# Altium PCB PCB2.PcbDoc
Units mm, origin at the board's own origin, x right, y up, seen from the top; angles counter-clockwise.
Board outline 109.47 x 143.76 mm, 2 copper layers (Top Layer, Bottom Layer); 56 components, 34 nets, 153 pads, 0 vias.
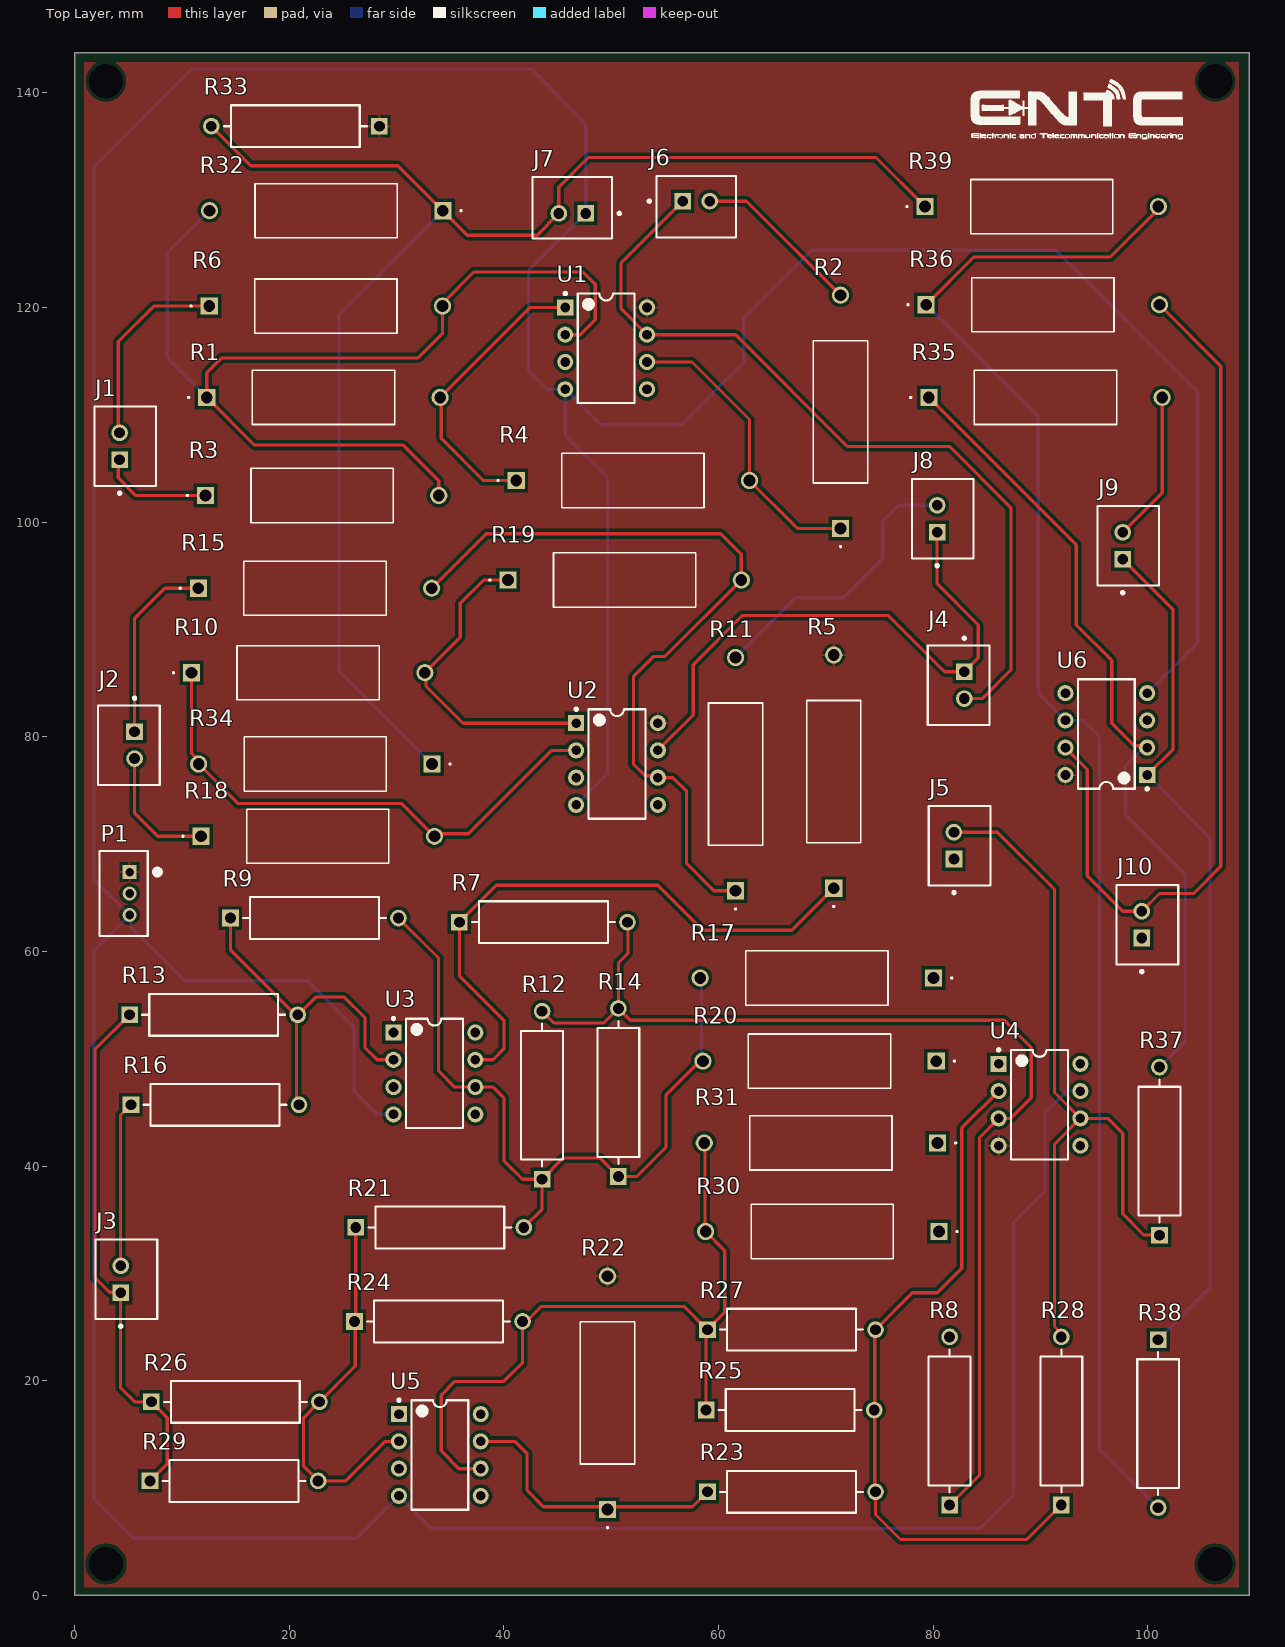
[diagram p0: Top Layer view]
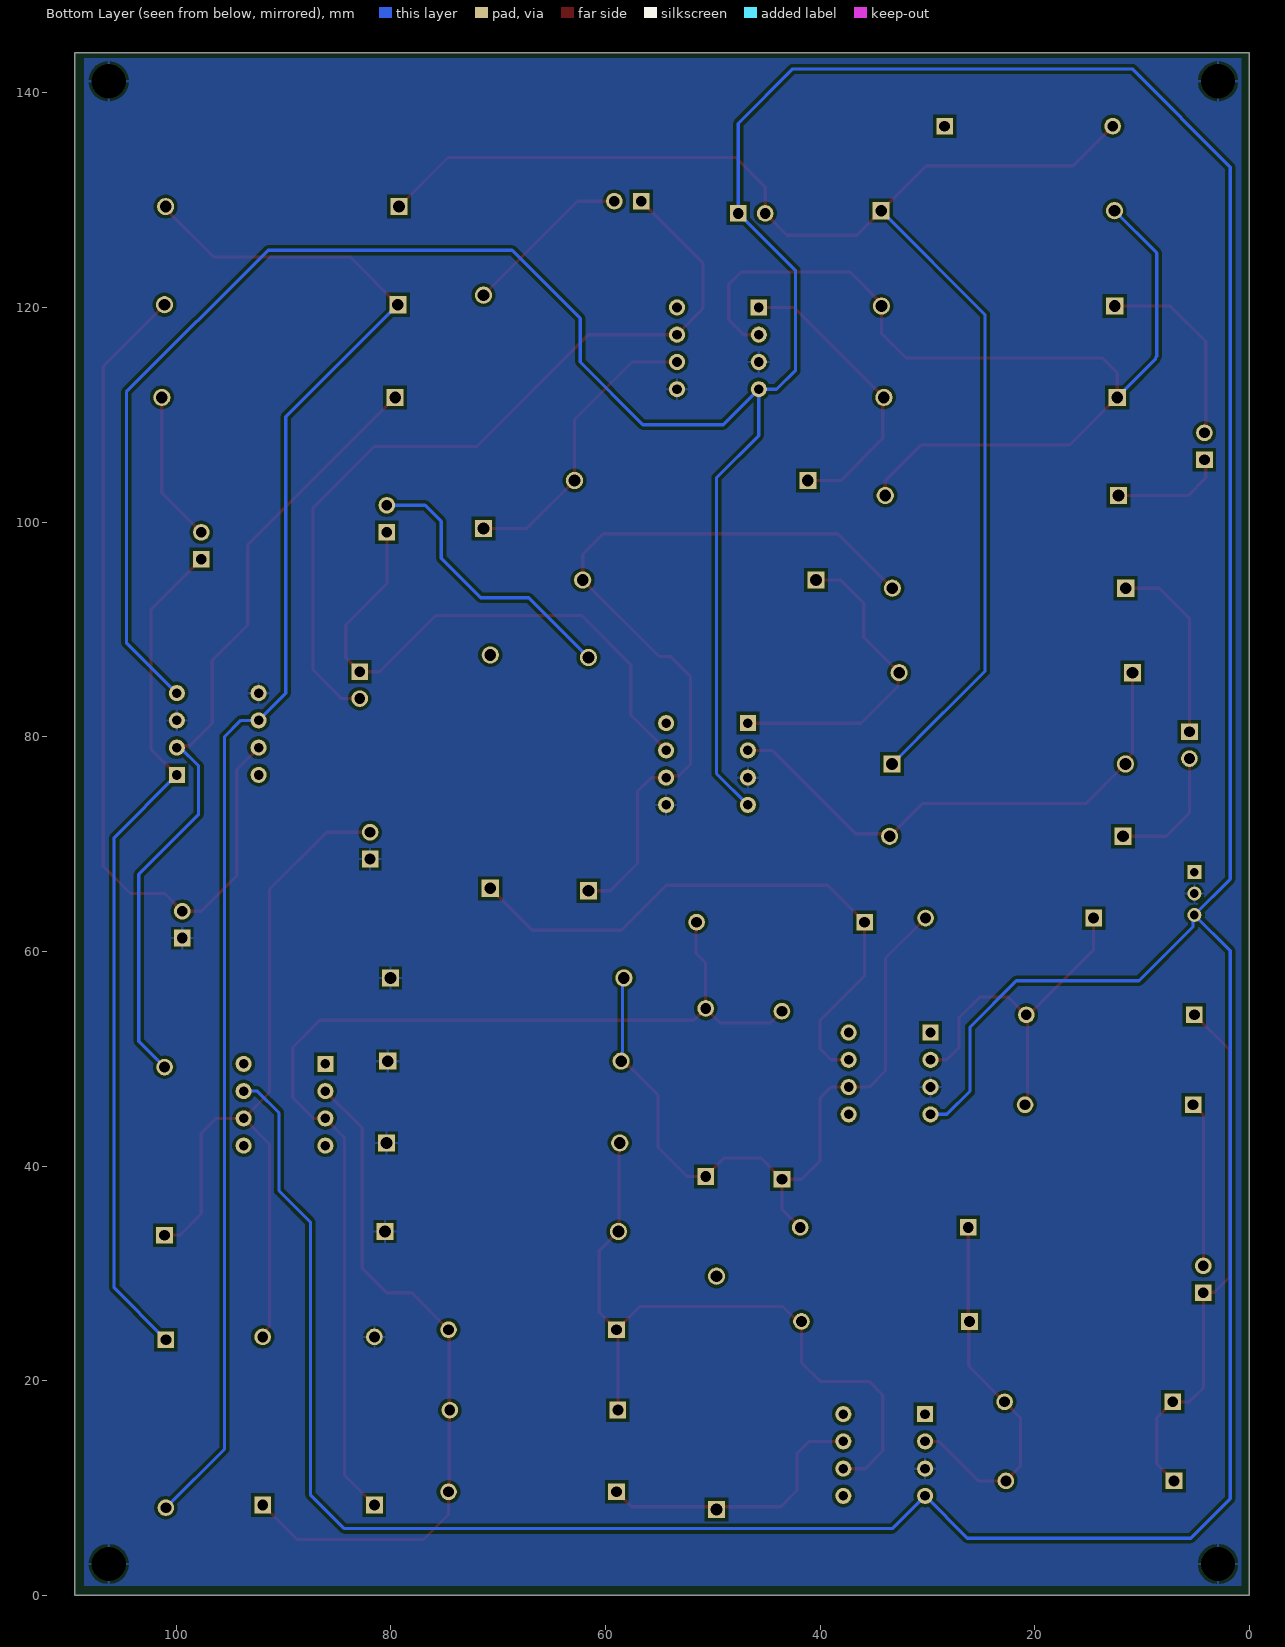
[diagram p1: Bottom Layer view, seen from below]
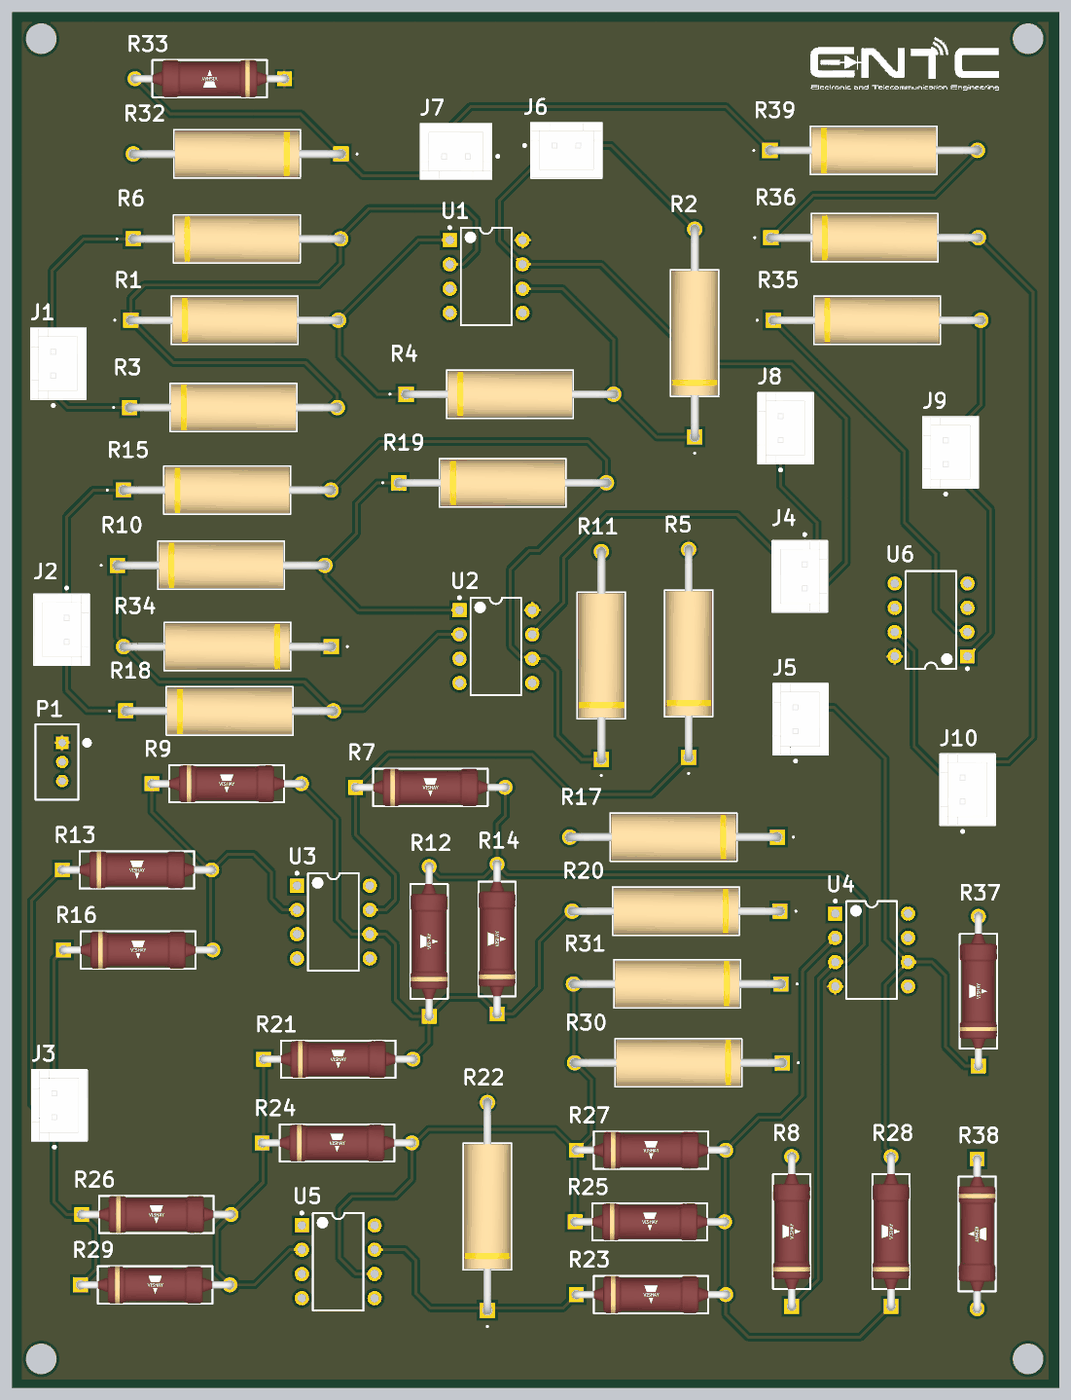
[diagram p2: 3D render of the assembled board from above, using the file's embedded part models]

## Layer stack, top to bottom
Top Solder: solder mask 0.0102, Solder Resist, Dk 3.5
Top Layer: signal copper 0.0356
Dielectric 1: dielectric 0.32, FR-4, Dk 4.8
Bottom Layer: signal copper 0.0356
Bottom Solder: solder mask 0.0102, Solder Resist, Dk 3.5

## Board outline
0,0 109.474,0 109.474,143.764 0,143.764

## Design rules (kind name [scope] priority, off if disabled: settings)
Clearance [All] p1: gap=0.3 ignorepadtopadclearanceinfootprint=FALSE
HoleSize [All] p1: absolutevalues=TRUE maxlimit=6.3 minlimit=0.3 maxpercent=80.000 minpercent=20.000
PolygonConnect [All] p1: connectstyle=Relief reliefconductorwidth=0.254 reliefentries=4 polygonreliefangle="90 Angle" airgapwidth=0.254
RoutingVias [All] p1: holewidth=0.3 width=0.6 viastyle="Through Hole" minholewidth=0.3 minwidth=0.6 maxholewidth=0.3 maxwidth=0.6
SilkToSolderMaskClearance [IsPad] p1: minsilkscreentomaskgap=0.1 clearancetoexposedcopper=TRUE
SolderMaskExpansion [All] p1: expansion=0.102 istentingtop=FALSE
UnRoutedNet [All] p1: checkbadconnections=TRUE
Width [All] p1: maxlimit=1 minlimit=0.3 preferedwidth=0.5
27 further rules are at their usual default settings.

## Components (designator, comment, footprint, x,y, rotation, side; value= is the part's Value field where it differs from the comment)
J1 "B2B-XH-A(LF)(SN)" FP-B2B-XH-A_LF_SN-MFG 4.716,107.081 r90 top
J2 "B2B-XH-A(LF)(SN)" FP-B2B-XH-A_LF_SN-MFG 5.063,79.228 r270 top
J3 "B2B-XH-A(LF)(SN)" FP-B2B-XH-A_LF_SN-MFG 4.826,29.464 r90 top
J4 "B2B-XH-A(LF)(SN)" FP-B2B-XH-A_LF_SN-MFG 82.381,84.82 r270 top
J5 "B2B-XH-A(LF)(SN)" FP-B2B-XH-A_LF_SN-MFG 82.465,69.866 r90 top
J6 "B2B-XH-A(LF)(SN)" FP-B2B-XH-A_LF_SN-MFG 57.932,129.396 r0 top
J7 "B2B-XH-A(LF)(SN)" FP-B2B-XH-A_LF_SN-MFG 46.375,129.303 r180 top
J8 "B2B-XH-A(LF)(SN)" FP-B2B-XH-A_LF_SN-MFG 80.899,100.33 r90 top
J9 "B2B-XH-A(LF)(SN)" FP-B2B-XH-A_LF_SN-MFG 98.188,97.81 r90 top
J10 "B2B-XH-A(LF)(SN)" FP-B2B-XH-A_LF_SN-MFG 99.966,62.504 r90 top
P1 "B3B-PH-K-S(LF)(SN)" JST-B3B-PH-K-S-3_V 4.572,65.405 r270 top
R1 "AC03000004701JAC00" RES_AC03_VIS 12.319,111.633 r0 top
R2 "AC03000004701JAC00" RES_AC03_VIS 71.374,99.416 r90 top
R3 "AC03000004701JAC00" RES_AC03_VIS 12.192,102.489 r0 top
R4 "AC03000004701JAC00" RES_AC03_VIS 41.148,103.886 r0 top
R5 "AC03000002201JAC00" RES_AC03_VIS 70.739,65.888 r90 top
R6 "AC03000004701JAC00" RES_AC03_VIS 12.548,120.142 r0 top
R7 "PR02000201003JA100" FP-PR02000201003JA100-MFG 43.688,62.738 r0 top
R8 "PR02000201003JA100" FP-PR02000201003JA100-MFG 81.534,16.256 r90 top
R9 "PR02000201003JA100" FP-PR02000201003JA100-MFG 22.352,63.119 r0 top
R10 "AC03000004701JAC00" RES_AC03_VIS 10.897,85.979 r0 top
R11 "AC03000004701JAC00" RES_AC03_VIS 61.595,65.659 r90 top
R12 "PR02000201003JA100" FP-PR02000201003JA100-MFG 43.561,46.609 r90 top
R13 "PR02000201003JA100" FP-PR02000201003JA100-MFG 12.954,54.102 r0 top
R14 "PR02000201003JA100" FP-PR02000201003JA100-MFG 50.673,46.863 r90 top
R15 "AC03000004701JAC00" RES_AC03_VIS 11.532,93.853 r0 top
R16 "PR02000201003JA100" FP-PR02000201003JA100-MFG 13.081,45.72 r0 top
R17 "AC03000004701JAC00" RES_AC03_VIS 80.035,57.531 r180 top
R18 "AC03000004701JAC00" RES_AC03_VIS 11.786,70.739 r0 top
R19 "AC03000004701JAC00" RES_AC03_VIS 40.386,94.615 r0 top
R20 "AC03000004701JAC00" RES_AC03_VIS 80.289,49.784 r180 top
R21 "PR02000201003JA100" FP-PR02000201003JA100-MFG 34.036,34.29 r0 top
R22 "AC03000002201JAC00" RES_AC03_VIS 49.657,8.001 r90 top
R23 "PR02000201003JA100" FP-PR02000201003JA100-MFG 66.802,9.652 r0 top
R24 "PR02000201003JA100" FP-PR02000201003JA100-MFG 33.909,25.527 r0 top
R25 "PR02000201003JA100" FP-PR02000201003JA100-MFG 66.675,17.272 r0 top
R26 "PR02000201003JA100" FP-PR02000201003JA100-MFG 14.986,18.034 r0 top
R27 "PR02000201003JA100" FP-PR02000201003JA100-MFG 66.802,24.765 r0 top
R28 "PR02000201003JA100" FP-PR02000201003JA100-MFG 91.948,16.256 r90 top
R29 "PR02000201003JA100" FP-PR02000201003JA100-MFG 14.859,10.668 r0 top
R30 "AC03000004701JAC00" RES_AC03_VIS 80.543,33.909 r180 top
R31 "AC03000004701JAC00" RES_AC03_VIS 80.416,42.164 r180 top
R32 "AC03000004701JAC00" RES_AC03_VIS 34.315,129.032 r180 top
R33 "PR02000201003JA100" FP-PR02000201003JA100-MFG 20.574,136.906 r180 top
R34 "AC03000004701JAC00" RES_AC03_VIS 33.299,77.47 r180 top
R35 "AC03000004701JAC00" RES_AC03_VIS 79.604,111.633 r0 top
R36 "AC03000004701JAC00" RES_AC03_VIS 79.35,120.269 r0 top
R37 "PR02000201003JA100" FP-PR02000201003JA100-MFG 101.092,41.402 r90 top
R38 "PR02000201003JA100" FP-PR02000201003JA100-MFG 100.965,16.002 r270 top
R39 "AC03000004701JAC00" RES_AC03_VIS 79.248,129.413 r0 top
U1 "TL072CP" P0008A 49.53,116.205 r0 top
U2 "TL072CP" P0008A 50.546,77.47 r0 top
U3 "UA741CP" P0008A 33.528,48.641 r0 top
U4 "UA741CP" P0008A 89.916,45.72 r0 top
U5 "UA741CP" P0008A 34.036,13.081 r0 top
U6 "TL072CP" P0008A 96.139,80.264 r180 top

## Footprints (in the part's own frame and the unit in brackets; to place one, negate y for a bottom-side part, rotate by r counter-clockwise, add the part's x,y. Pads: shape width x height; smd on the part's side, far side on the other; paste and mask are expansions set on the pad)
FP-B2B-XH-A_LF_SN-MFG [mm]
  rect 1.55x1.55 hole 1 paste-1000 mask+0: 1(-1.25,0.525)
  round 1.55 hole 1 paste-1000 mask+0: 2(1.25,0.525)
  silkscreen extent -4.5,-2.88 3.7,2.88, body extent -3.8,-2.98 3.8,2.98, height 0.25
FP-PR02000201003JA100-MFG [mm]
  rect 1.55x1.55 hole 1 paste-1000 mask+0: 1(-7.83,0)
  round 1.55 hole 1 paste-1000 mask+0: 2(7.83,0)
  silkscreen extent -6.66,-1.95 6.66,1.95, body extent -8.7,-2.05 8.7,2.05, height 0.25
JST-B3B-PH-K-S-3_V [mm] "Connector, 3-Leads, Body 7.9x4.5mm, Pitch 2mm"
  rect 1.3x1.3 hole 0.8: 1(-2,0.55)
  round 1.3 hole 0.8: 2(0,0.55) 3(2,0.55)
  silkscreen extent -3.95,-2.25 3.95,3.4, body extent -3.95,-2.25 3.95,2.25, height 6
P0008A [mm] "DIP, 8-Leads, Body 10.15x6.6mm, Pitch 2.54mm"
  rect 1.5x1.5 hole 0.9: 1(-3.81,3.81)
  round 1.5 hole 0.9: 2(-3.81,1.27) 3(-3.81,-1.27) 4(-3.81,-3.81) 5(3.81,-3.81) 6(3.81,-1.27) 7(3.81,1.27) 8(3.81,3.81)
  silkscreen extent -3.93,-5.1 2.65,5.23, body extent -3.95,-5.07 3.95,5.07, height 5.08
RES_AC03_VIS [mil]
  rect 63x63 / inner round 60 / far side rect 63x63 hole 43 paste-31.5 mask+0: 1(0,0)
  round 63 / inner round 60 / far side round 63 hole 43 paste-31.5 mask+0: 2(856,0)
  silkscreen extent -69,-100 689,100, body extent -16,-95 873,95, height 189

## Part data
J1 J2 J3 J4 J5 J6 J7 J8 J9 J10: library part CMP-2000-05888-3, "CONN HEADER VERT 2POS 2.5MM", Color=Natural, Contact Resistance=20mR, Current Rating=3A, Housing Color=White, Insulation Resistance=1GR, Max Operating Temperature=85°C, Max Voltage Rating (AC)=250V, Min Operating Temperature=-25°C, Connector Type="Male Pin", Contact Material=Brass, Contact Plating=Tin, Contact Type="Male Pin", Depth=5.75mm, Fastening Type=Detent, Housing Material=Polyamide, Lead Free="Lead Free", Lead Pitch=2.5mm, Length=7.4mm, Max Current Rating=3A, Max Voltage Rating (DC)=250V, Mount="Through Hole", Number of Contacts=2, Number of Positions=2, Number of Rows=1, Orientation=Straight, Packaging=Bulk, Pitch=2.5mm, REACH SVHC="No SVHC", Series=XH, Termination=Solder, Voltage Rating=250V, Voltage Rating (AC)=250V, Wire/Cable Gauge=22AWG
P1: library part CMP-2000-05164-1, "Male Header, Pitch 2 mm, 1 x 3 Position, Height 6 mm, Tail Length 3.4 mm, -25 to 85 degC, RoHS, Bulk", Manufacturer=JST, Datasheet URL=https://datasheet.ciiva.com/11746/0900766b80826550-11746939.pdf, Datasheet Version=Oct-06, Manufacturer URL=http://www.jst.com/home2.html, No of Positions=3, Pitch=2mm, Style/Orientation=StraightHeader/Plug, Termination=Crimp, Type=ShroudedHeader
R1 R2 R3 R4 R6 R10 R11 R15 R17 R18 R19 R20 R30 R31 R32 R34 R35 R36 R39: library part CMP-00030-42521947-1, "AC03000004701JAC00 Fixed Resistor, Wire Wound, 3W, 4700ohm, 5% +/-Tol, 100ppm/Cel, Through Hole Mount", Case/Package=Axial, Max Operating Temperature=275°C, Max Power Dissipation=3W, Min Operating Temperature=-40°C, Resistance=4.7kΩ, Temperature Coefficient=100ppm/°C, Tolerance=5%, Voltage Rating (DC)=118V, Composition=Wirewound, Contact Plating=Tin, Diameter=4.8mm, Features="Flame Retardant Coating", Lead Diameter=800µm, Lead Free="Lead Free", Length=13mm, Military Standard=Not, NexarPartId=42521947, Number of Pins=2, Number of Terminations=2, Packaging="Cut Tape (CT)", Power Rating=3W, Radiation Hardening=No, REACH SVHC=Unknown, RoHS=Compliant, Termination=Axial, Width=4.8mm
R5 R22: library part CMP-00030-39746899-1, "AC03000002201JAC00 Resistor, 2.2 kOhm, ± 5%, 3 W, Axial Leaded, Wirewound, General Purpose", Case/Package=Axial, Max Operating Temperature=275°C, Max Power Dissipation=3W, Min Operating Temperature=0°C, Resistance=2.2kΩ, Temperature Coefficient=180ppm/°C, Tolerance=5%, Voltage Rating (DC)=81V, Composition=Wirewound, Contact Plating=Tin, Diameter=4.8mm, Features="Flame Retardant Coating", Lead Diameter=800µm, Length=13mm, Military Standard=Not, NexarPartId=39746899, Number of Pins=2, Number of Terminations=2, Packaging="Tape & Box (TB)", Power Rating=3W, Radiation Hardening=No, REACH SVHC=Unknown, RoHS=Compliant, Schedule B="8533210080, 8533210080", Termination=Axial, Width=4.8mm
R7 R8 R9 R12 R13 R14 R16 R21 R23 R24 R25 R26 R27 R28 R29 R33 R37 R38: library part CMP-00030-42817933-1, "PR02000201003JA100 Fixed Resistor, Metal Film, 2W, 100000ohm, 500V, 5% +/-Tol, 250ppm/Cel, Through Hole Mount", Case/Package=Conformal, Max Operating Temperature=155°C, Min Operating Temperature=-55°C, Operating Supply Voltage=500V, Power Rating=2W, Resistance=100kΩ, Temperature Coefficient=250ppm/°C, Tolerance=5%, Composition="Metal Film", Contact Plating=Tin, Diameter=3.9mm, Lead Free="Lead Free", Length=12mm, Military Standard=Not, Mount="Through Hole", NexarPartId=42817933, Radiation Hardening=No, REACH SVHC="No SVHC", RoHS=Compliant, Schedule B="8533210090, 8533210090", Termination=Axial, Voltage Rating=500V, Voltage Rating (DC)=500V, Width=3.9mm
U1 U2 U6: library part CMP-0017-00950-2, "Dual Low-Noise JFET-Input General-Purpose Operational Amplifier, 7 to 36 V, 0 to 70 degC, 8-pin DIP (P8), Pb-Free (RoHS)", Manufacturer="Texas Instruments", Rating=Catalog, Total Supply Voltage(Max)(+5V is 5, +/-5V is 10)=36, Total Supply Voltage(Min)(+5V is 5, +/-5V is 10)=7, CMRR(Min)(dB)=70, Code_JEDEC=MS-001, ComponentLink1Description="Manufacturer URL", ComponentLink1URL=http://www.ti.com/, ComponentLink2Description=Datasheet, ComponentLink2URL=http://www.ti.com/lit/ds/symlink/tl072.pdf, ComponentLink3Description="Package Specification", ComponentLink3URL=http://www.ti.com/litv/pdf/mpdi001b, DatasheetVersion=SLOS080J, Eco-Plan="Pb-Free (RoHS)", GBW(Typ)(MHz)=3, IIB(Max)(pA)=200, Iq per channel(Max)(mA)=2.5, Mounting Technology="Through Hole", Number of Channels=2, Offset Drift(Typ)(uV/C)=18, PackageDescription="8-Pin Plastic In-Line, Body 9.59 x 6.35 mm, Pitch 2.54 mm", PackageReference=P0008A, PackageVersion="4040082/E, 04/2010", PartNumber=TL072CP, Slew Rate(Typ)(V/us)=13, Sub Family="General Purpose Amplifier, High Supply Voltage Amplifier (>=30V)", Vio (25C)(Max)(mV)=10, Vn at 1kHz(Typ)(nV/rtHz)=18
U3 U4 U5: library part CMP-0017-00973-2, "General-Purpose Operational Amplifier, 7 to 36 V, 0 to 70 degC, 8-pin DIP (P8), Pb-Free (RoHS)", Manufacturer="Texas Instruments", Total Supply Voltage(Max)(+5V is 5, +/-5V is 10)=36, Total Supply Voltage(Min)(+5V is 5, +/-5V is 10)=7, CMRR(Min)(dB)=70, Code_JEDEC=MS-001, ComponentLink1Description="Manufacturer URL", ComponentLink1URL=http://www.ti.com/, ComponentLink2Description=Datasheet, ComponentLink2URL=http://www.ti.com/lit/ds/symlink/ua741.pdf, ComponentLink3Description="Package Specification", ComponentLink3URL=http://www.ti.com/litv/pdf/mpdi001b, DatasheetVersion=SLOS094B, Eco-Plan="Pb-Free (RoHS)", GBW(Typ)(MHz)=1, IIB(Max)(pA)=800000, Iq per channel(Max)(mA)=2.8, Mounting Technology="Through Hole", Number of Channels=1, PackageDescription="8-Pin Plastic In-Line, Body 9.59 x 6.35 mm, Pitch 2.54 mm", PackageReference=P0008A, PackageVersion="4040082/E, 04/2010", PartNumber=UA741CP, Slew Rate(Typ)(V/us)=0.5, Sub Family="General Purpose Amplifier, High Supply Voltage Amplifier (>=30V)", Vio (25C)(Max)(mV)=6

## Free pads (board coordinates)
  round 1.524 hole 3.2: 2(2.921,141.097) 3(106.299,141.097) 4(106.299,2.921) 5(2.921,2.921)

## Nets (pads, with @x,y where several pads share a name; then routed paths per layer and width w, separated by ;. In a path a pad name is that pad's centre, name@x,y a point inside that pad or via, vN(x,y) a via of type N, cw(c..) or ccw(c..) an arc to the next point about the centre after c; other vN are vias at no path point)
+12: P1.1 R5.2 R22.2 R33.1 U1.8 U2.8 U4.4 U6.8
-12: J7.1 P1.3 U1.4 U2.4 U3.4 U4.7 U5.4 U6.4 | length 523.1
  Bottom Layer w0.3: U3.4 28.194,44.831 26.035,46.99 26.035,52.959 21.717,57.277 10.287,57.277 5.259,62.305 5.259,63.268 P1.3 ; U2.4 49.657,76.581 49.657,104.14 45.72,108.077 U1.4 ; U4.7 92.456,46.99 90.424,44.958 90.424,37.719 87.503,34.798 87.503,9.398 84.328,6.223 33.274,6.223 U5.4 26.289,5.334 5.461,5.334 5.335,5.46 1.778,9.017 1.778,60.061 P1.3 ; U6.4 104.648,88.773 104.648,112.141 91.44,125.349 68.707,125.349 62.357,118.999 62.357,114.935 56.515,109.093 49.022,109.093 U1.4 ; P1.3 1.778,66.749 1.778,133.096 10.922,142.24 42.545,142.24 47.625,137.16 J7.1 42.291,123.444 42.291,114.173 44.069,112.395 U1.4
Bias: J7.2 R32.1 R33.2 R34.1 R39.1 | length 136.2
  Top Layer w0.3: R33.2 16.427,133.223 30.124,133.223 R32.1 36.601,126.746 43.093,126.746 J7.2 45.125,131.231 47.879,133.985 74.676,133.985 R39.1
  Bottom Layer w0.3: R34.1 28.529,82.24 28.504,82.24 24.638,86.106 24.638,119.355 R32.1
GND: J5.1 J10.1 P1.2 pad.2 pad.3 pad.4 pad.5 R8.2 R17.1 R20.1 R30.1 R31.1 U1.3 U1.5 U2.3 U2.5 U3.3 U5.3 U6.3 U6.5
NetJ1_1: J1.1 R3.1 | length 10.7
  Top Layer w0.3: J1.1@4.064,106.077 4.064,104.14 5.715,102.489 R3.1
NetJ1_2: J1.2 R6.1 | length 18.6
  Top Layer w0.3: J1.2@4.064,108.077 4.064,116.84 7.366,120.142 R6.1
NetJ2_1: J2.1 R15.1 | length 17.7
  Top Layer w0.3: J2.1 5.588,91.059 8.385,93.856 9.632,93.856 9.634,93.853 R15.1
NetJ2_2: J2.2 R18.1 | length 12.2
  Top Layer w0.3: J2.2 5.588,72.898 7.747,70.739 R18.1
NetJ3_1: J3.1 R13.1 R26.1 R29.1 | length 49.7
  Top Layer w0.3: R13.1 1.905,50.883 1.905,29.591 3.252,28.244 4.25,28.244 4.276,28.218 4.276,19.346 5.588,18.034 R26.1 8.636,16.554 8.636,12.275 R29.1
NetJ3_2: J3.2 R16.1 | length 15.4
  Top Layer w0.3: J3.2@4.276,30.718 4.276,44.745 R16.1
NetJ4_1: J4.1 J8.1 U2.7 | length 53.8
  Top Layer w0.3: U2.7 57.658,82.042 57.658,86.741 62.23,91.313 75.819,91.313 81.062,86.07 J4.1 84.201,87.365 84.201,90.424 80.374,94.251 J8.1
NetJ4_2: J4.2 J6.1 U1.7 | length 77
  Top Layer w0.3: J6.1 50.927,124.166 50.927,119.888 U1.7 61.595,117.475 72.009,107.061 81.534,107.061 87.249,101.346 87.249,86.233 84.586,83.57 J4.2
NetJ5_2: J5.2 R28.2 R37.1 U4.6 | length 71.8
  Top Layer w0.3: J5.2 85.983,71.116 91.313,65.786 91.313,46.863 U4.6 ; R28.2 91.948,24.424 91.313,25.059 91.313,42.037 U4.6 ; R37.1 99.651,33.572 97.663,35.56 97.663,43.053 96.266,44.45 U4.6
NetJ6_2: J6.2 R2.2 | length 15.8
  Top Layer w0.3: J6.2 62.611,129.921 R2.2
NetJ8_2: J8.2 R11.2 | length 26.7
  Bottom Layer w0.3: R11.2 64.323,90.129 67.158,92.964 71.633,92.964 75.311,96.642 75.311,100.076 76.815,101.58 J8.2
NetJ9_1: J9.1 R38.1 U6.1 | length 80.1
  Top Layer w0.3: J9.1 102.362,91.861 102.362,78.867 U6.1
  Bottom Layer w0.3: U6.1 105.791,70.612 105.791,28.658 R38.1
NetJ9_2: J9.2 R35.2 | length 14.1
  Top Layer w0.3: J9.2 101.346,102.743 R35.2
NetJ10_2: J10.2 R36.2 U6.7 | length 83
  Top Layer w0.3: U6.7 94.361,76.962 94.361,67.056 97.663,63.754 J10.2 101.092,65.405 104.267,65.405 106.807,67.945 106.807,114.554 R36.2
NetR1_1: R1.1 R3.2 R6.2 R32.2 U1.2 | length 98.3
  Top Layer w0.3: R3.2@33.686,102.738 R3.2 33.934,103.861 30.607,107.188 16.764,107.188 R1.1 12.319,113.919 13.716,115.316 32.004,115.316 34.29,117.602 34.29,120.396 37.211,123.317 47.371,123.317 48.514,122.174 48.514,118.872 47.117,117.475 U1.2
  Bottom Layer w0.3: R1.1 8.763,115.189 8.763,115.316 8.636,115.443 8.636,125.095 R32.2
NetR1_2: R1.2 R4.1 U1.1 | length 28.4
  Top Layer w0.3: R4.1 38.1,103.886 34.163,107.823 34.163,111.531 R1.2 42.443,120.015 U1.1 U1.1@45.12,119.415
NetR2_1: R2.1 R4.2 U1.6 | length 27.8
  Top Layer w0.3: U1.6 57.531,114.935 62.89,109.576 R4.2 67.183,99.593 67.183,99.591 67.359,99.416 R2.1
NetR5_1: R5.1 R7.1 U3.7 | length 56.3
  Top Layer w0.3: U3.7 38.989,49.911 40.005,50.927 40.005,53.594 35.858,57.741 R7.1 39.287,66.167 54.356,66.167 58.547,61.976 66.827,61.976 R5.1
NetR7_2: R7.2 R8.1 R12.2 R14.2 U4.3 | length 103
  Top Layer w0.3: R12.2 44.66,53.34 49.32,53.34 R14.2 ; R7.2 51.562,62.694 51.562,59.817 50.673,58.928 R14.2 ; R8.1 84.328,11.22 84.328,42.672 U4.3 87.249,44.45 89.154,46.355 89.154,51.054 86.614,53.594 51.772,53.594 R14.2
NetR9_1: R9.1 R13.2 R16.2 U3.2 | length 33.8
  Top Layer w0.3: R9.1 14.522,60.154 20.574,54.102 R13.2 20.828,54.102 22.479,55.753 25.146,55.753 27.051,53.848 27.051,51.054 28.194,49.911 U3.2 ; R13.2@20.679,53.997 20.679,45.952 R16.2
NetR9_2: R9.2 R12.1 R14.1 R17.2 R20.2 R21.2 U3.6 | length 69.9
  Top Layer w0.3: R9.2 33.909,59.392 33.909,48.895 35.433,47.371 U3.6 38.989,47.371 39.115,47.245 40.005,46.355 40.005,40.513 41.739,38.779 R12.1 ; R21.2 43.561,35.985 R12.1 ; R20.2 58.268,49.784 55.118,46.634 55.118,41.783 52.368,39.033 R14.1 48.939,40.767 45.549,40.767 R12.1
  Bottom Layer w0.3: R17.2 58.42,57.404 58.42,49.911 R20.2
NetR10_1: R10.1 R18.2 R34.2 U2.2 | length 50.1
  Top Layer w0.3: R10.1 10.897,78.482 11.557,77.822 R34.2 15.24,73.787 30.48,73.787 R18.2 33.762,70.973 36.683,70.973 44.45,78.74 U2.2
NetR10_2: R10.2 R19.1 U2.1 | length 29.9
  Top Layer w0.3: R19.1 38.1,94.615 35.941,92.456 35.941,89.281 R10.2 32.746,85.872 32.746,84.729 36.195,81.28 U2.1
NetR11_1: R11.1 R15.2 R19.2 U2.6 | length 74.4
  Top Layer w0.3: R15.2 38.354,98.933 60.198,98.933 62.128,97.003 R19.2 55.016,87.503 53.975,87.503 52.07,85.598 52.07,77.47 53.156,76.384 54.172,76.384 U2.6 55.753,76.2 57.023,74.93 57.023,68.199 59.563,65.659 R11.1
NetR21_1: R21.1 R24.1 R26.2 R29.2 U5.2 | length 35.4
  Top Layer w0.3: R26.2@22.752,17.97 26.162,21.38 26.162,25.444 R24.1 26.206,25.654 R21.1 ; R26.2 21.336,16.554 21.336,12.021 R29.2 25.273,10.668 28.956,14.351 U5.2
NetR22_1: R22.1 R23.1 U5.7 | length 26.4
  Top Layer w0.3: U5.7 41.021,14.351 42.164,13.208 42.164,9.779 43.688,8.255 49.403,8.255 R22.1 49.911,8.255 57.575,8.255 R23.1
NetR23_2: R23.2 R25.2 R27.2 R28.1 U4.2 | length 65.3
  Top Layer w0.3: U4.2 82.677,43.561 82.677,30.48 80.391,28.194 78.061,28.194 R27.2 74.568,24.701 74.568,17.335 R25.2 74.568,17.209 74.568,9.716 R23.2 74.632,7.537 76.962,5.207 88.729,5.207 R28.1
NetR24_2: R24.2 R25.1 R27.1 R30.2 R31.2 U5.6 | length 67.4
  Top Layer w0.3: U5.6 35.814,11.811 34.163,13.462 34.163,18.669 35.433,19.939 40.005,19.939 41.739,21.673 R24.2 42.077,25.527 43.474,26.924 56.813,26.924 R27.1 ; R31.2 58.737,42.1 58.737,33.972 R30.2 60.579,32.131 60.579,26.372 R27.1 ; R25.1 58.845,24.638 R27.1
NetR35_1: R35.1 R37.2 U6.2 | length 75.8
  Top Layer w0.3: R35.1 93.345,97.892 93.345,90.424 96.647,87.122 96.647,81.28 98.749,79.178 99.765,79.178 U6.2
  Bottom Layer w0.3: U6.2 99.624,78.994 97.917,77.287 97.917,72.771 100.33,70.358 103.505,67.183 103.505,51.645 R37.2
NetR36_1: R36.1 R38.2 R39.2 U6.6 | length 147.6
  Top Layer w0.3: R36.1 83.795,124.714 96.52,124.714 100.99,129.184 R39.2
  Bottom Layer w0.3: R36.1 89.789,109.83 89.789,84.074 U6.6 93.98,81.534 95.504,80.01 95.504,13.633 R38.2
pads on no net: U3.1 U3.5 U3.8 U4.1 U4.5 U4.8 U5.1 U5.5 U5.8

## Polygon pours and split planes (outlines as drawn)
+12 on Top Layer "+12_L01_P002" (solid, pour order 2): 0.889,142.875 108.458,142.875 108.458,0.762 0.889,0.762
GND on Bottom Layer "GND_L02_P001" (solid, pour order 1): 108.585,0.889 0.762,0.889 0.762,143.256 108.585,143.256

## Silkscreen, mask and mechanical layers (free items; w line width, h text height)
Top Overlay:
  drawing of 54 lines, arcs and shapes, not listed
Board:
  the board outline again, w0.2